# EAGLE board shift_4leds (EAGLE 5.06)
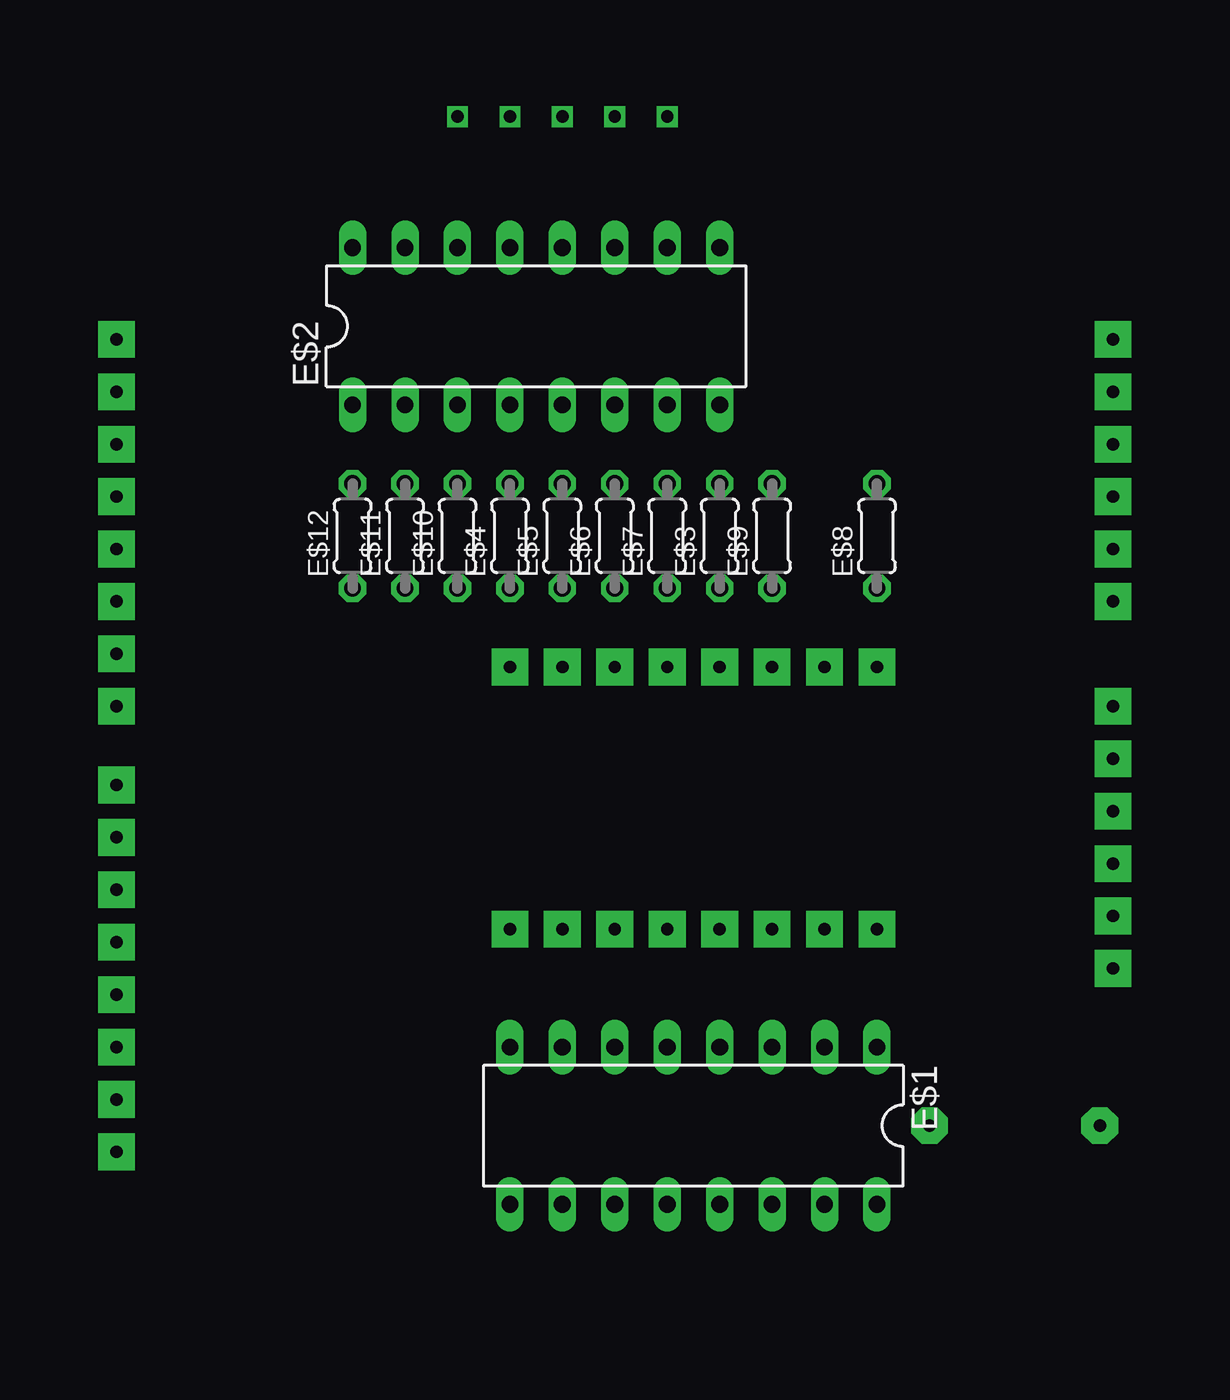
[diagram p0: board, top side]
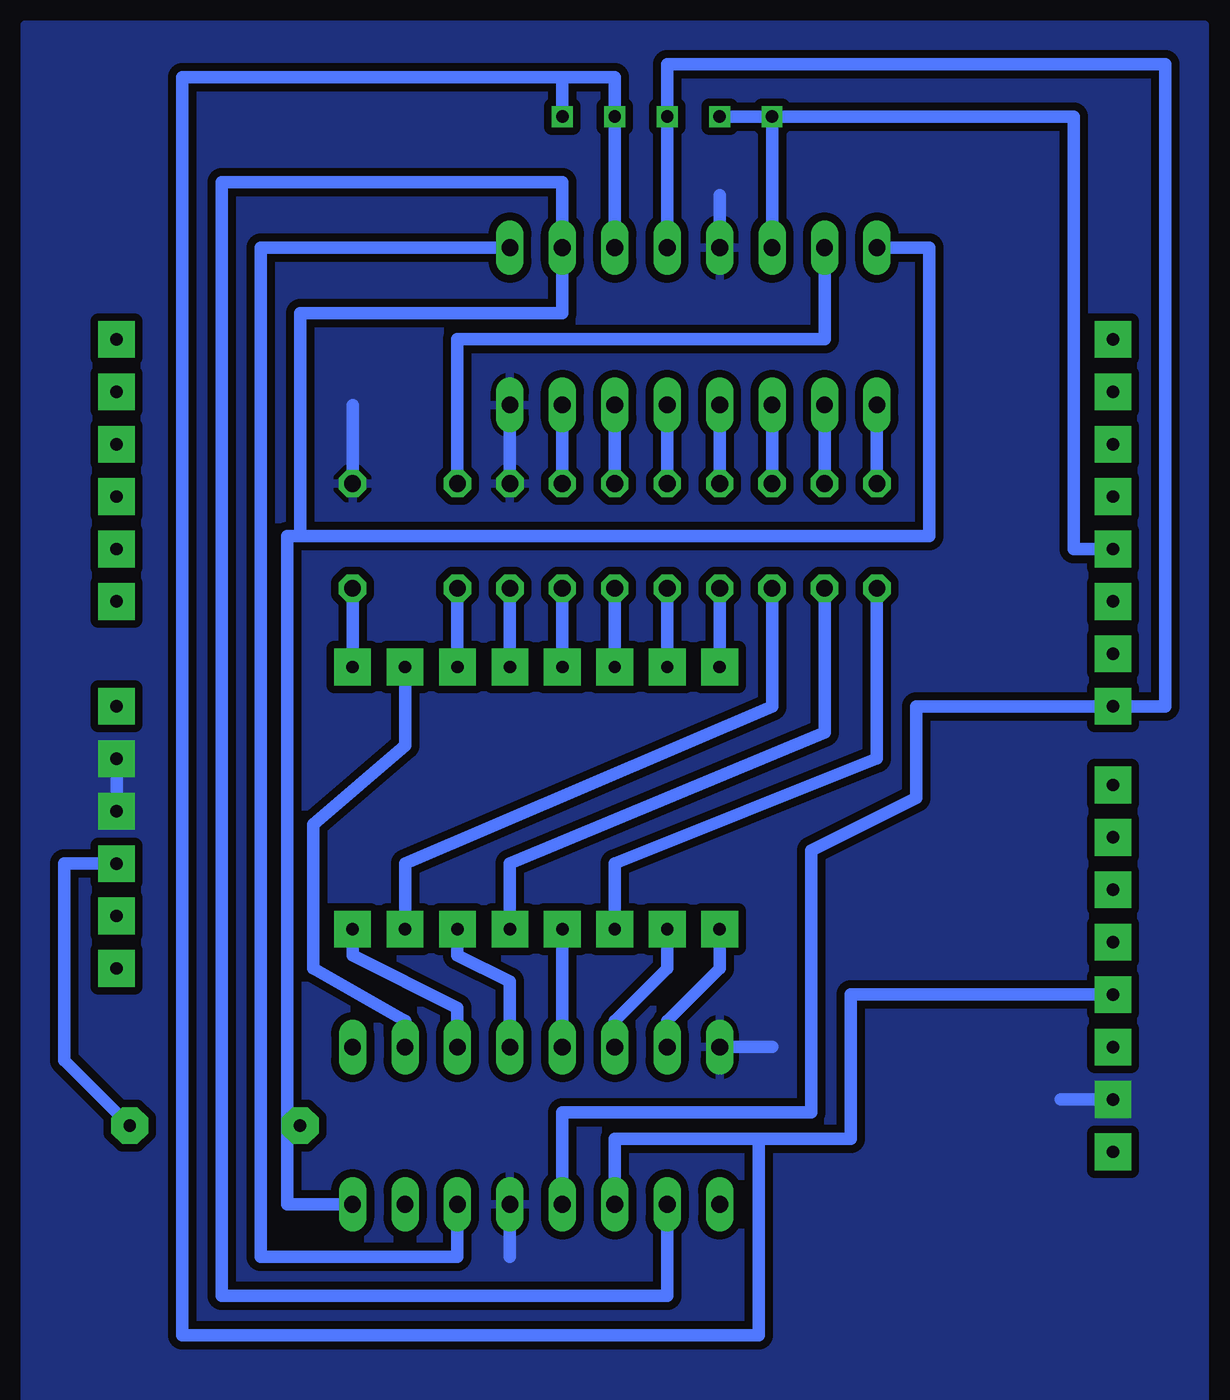
[diagram p1: board, bottom side, seen from below]

No outline drawn. Coordinates in mm, seen from the top.
Copper layers (1*16): Top 0.035mm / dielectric 1.5mm / Bottom 0.035mm
Design rules "default *": minimum track width 10mil, minimum drill 24mil, track to track 15mil, track to pad 15mil, pad to pad 8mil, via to via 8mil, smd to smd 8mil, copper to edge 40mil, drill to drill 8mil, minimum pad ring 10mil, minimum via ring 8mil, stop-mask expansion 4mil, vias tented up to drill 0mil, thermal gap 10mil

## Footprints (pad centres in the part's own frame; a part is rotated, then mirrored left to right if it is on the bottom)
DIL16 = drill 0.813 long: 1 -8.89,-3.81; 2 -6.35,-3.81; 3 -3.81,-3.81; 4 -1.27,-3.81; 5 1.27,-3.81; 6 3.81,-3.81; 7 6.35,-3.81; 8 8.89,-3.81; 9 8.89,3.81; 10 6.35,3.81; 11 3.81,3.81; 12 1.27,3.81; 13 -1.27,3.81; 14 -3.81,3.81; 15 -6.35,3.81; 16 -8.89,3.81
0204/5 = drill 0.813 octagon: 1 -2.54,0; 2 2.54,0

## Placement (x,y rotation side)
E$1  [DIL16]  68.58,14.61 180 top
E$2  [DIL16]  60.96,53.34 0 top
E$3  [0204/5]  69.85,43.18 90 top
E$4  [0204/5]  59.69,43.18 90 top
E$5  [0204/5]  62.23,43.18 90 top
E$6  [0204/5]  64.77,43.18 90 top
E$7  [0204/5]  67.31,43.18 90 top
E$8  [0204/5]  77.47,43.18 90 top
E$9  [0204/5]  72.39,43.18 90 top
E$10  [0204/5]  57.15,43.18 90 top
E$11  [0204/5]  54.61,43.18 90 top
E$12  [0204/5]  52.07,43.18 90 top

## Library data of the parts
E$1 E$2 = 40xx
E$3-E$12 = rcl

## Nets
+5V: E$1.10 E$1.16 E$2.16
GND: E$1.8 E$1.13 E$2.8 E$2.13 E$3.2 E$8.2
S$1: E$1.7
S$2: E$1.6
S$3: E$12.1
S$4: E$1.5
S$5: E$11.1
S$6: E$5.1
S$7: E$2.1 E$12.2
S$8: E$1.12 E$2.12
S$9: E$4.1
S$10: E$7.1
S$11: E$6.1
S$12: E$2.15 E$9.2
S$13: E$10.1
S$14: E$1.3
S$15: E$1.2
S$16: E$1.14 E$2.9
S$17: E$1.4
S$18: E$8.1
S$19: E$3.1
S$21: E$2.14
S$22: E$9.1
S$23: E$1.11 E$2.11
S$24: E$2.2 E$11.2
S$25: E$2.3 E$10.2
S$26: E$2.4 E$4.2
S$27: E$2.5 E$5.2
S$28: E$2.6 E$6.2
S$29: E$2.7 E$7.2

## Tracks (layer width: path | path; a pad name or v marks a point on that pad's centre or on a via)
+5V
  Bottom 0.61: 80.01,43.18 80.01,53.98 67.31,53.98 67.31,60.33 83.82,60.33 83.82,6.35 62.23,6.35 E$1.10 | 80.01,43.18 80.64,43.18 80.64,10.79 E$1.16 | E$2.16 49.53,57.15 49.53,43.18 80.01,43.18
GND  (via drill 0.6 pad 1.78)
  Bottom 0.61: 57.15,18.41 E$1.8 | E$2.13 59.69,59.69 | 69.85,8.26 E$1.13 | E$3.2 E$2.8 | E$8.2 77.47,49.53 | v88.9,29.84 v88.9,32.38 | v40.64,15.88 43.18,15.88
  pour Bottom: 36.2,67.94 93.34,67.94 93.34,0.64 36.2,0.64
S$1  (via drill 0.6 pad 1.78)
  Bottom 0.61: v59.69,24.13 59.69,22.23 62.23,19.68 E$1.7
S$2  (via drill 0.6 pad 1.78)
  Bottom 0.61: v62.23,24.13 62.23,22.23 64.77,19.68 E$1.6
S$3  (via drill 0.6 pad 1.78)
  Bottom 0.61: v64.77,24.13 64.77,27.3 52.07,32.38 E$12.1
S$4  (via drill 0.6 pad 1.78)
  Bottom 0.61: E$1.5 v67.31,24.13
S$5  (via drill 0.6 pad 1.78)
  Bottom 0.61: v69.85,24.13 69.85,27.3 54.61,33.66 E$11.1
S$6  (via drill 0.6 pad 1.78)
  Bottom 0.61: v62.23,36.83 E$5.1
S$7
  Bottom 0.61: E$12.2 E$2.1
S$8  (via drill 0.6, 0.6 pad 1.78)
  Bottom 0.61: E$2.12 v62.23,63.5 62.23,66.04 38.1,66.04 38.1,34.92 40.01,34.92 | 40.01,34.92 v40.64,34.92 | E$1.12 67.31,15.24 55.24,15.24 55.24,27.94 50.16,30.48 50.16,34.92 40.01,34.92
S$9  (via drill 0.6 pad 1.78)
  Bottom 0.61: v59.69,36.83 E$4.1
S$10  (via drill 0.6 pad 1.78)
  Bottom 0.61: v67.31,36.83 E$7.1
S$11  (via drill 0.6 pad 1.78)
  Bottom 0.61: v64.77,36.83 E$6.1
S$12
  Bottom 0.61: E$2.15 54.61,52.7 72.39,52.7 E$9.2
S$13  (via drill 0.6 pad 1.78)
  Bottom 0.61: v74.93,24.13 74.93,27.3 57.15,34.92 E$10.1
S$14  (via drill 0.6 pad 1.78)
  Bottom 0.61: v77.47,24.13 77.47,22.86 72.39,20.32 E$1.3
S$15  (via drill 0.6 pad 1.78)
  Bottom 0.61: v74.93,36.83 74.93,33.02 79.38,29.21 79.38,22.23 74.93,19.68 E$1.2
S$16
  Bottom 0.61: E$2.9 81.92,57.15 81.92,8.26 72.39,8.26 E$1.14
S$17  (via drill 0.6 pad 1.78)
  Bottom 0.61: E$1.4 69.85,21.59 72.39,22.86 v72.39,24.13
S$18  (via drill 0.6 pad 1.78)
  Bottom 0.61: v77.47,36.83 E$8.1
S$19  (via drill 0.6 pad 1.78)
  Bottom 0.61: v69.85,36.83 E$3.1
S$20  (via drill 0.6 pad 1.78)
  other vias: 40.64,52.7
S$21  (via drill 0.6, 0.6 pad 1.78)
  Bottom 0.61: v57.15,63.5 E$2.14 | v57.15,63.5 v59.69,63.5 | v57.15,63.5 42.55,63.5 42.55,42.55 v40.64,42.55
S$22  (via drill 0.6 pad 1.78)
  Bottom 0.61: v72.39,36.83 E$9.1
S$23  (via drill 0.6, 0.6 pad 1.78)
  Bottom 0.61: E$2.11 v64.77,63.5 64.77,65.41 67.31,65.41 | 67.31,65.41 v67.31,63.5 | 67.31,65.41 85.72,65.41 85.72,4.45 57.78,4.45 57.78,13.97 | E$1.11 64.77,13.97 57.78,13.97 | 57.78,13.97 53.34,13.97 53.34,20.95 v40.64,20.95
S$24
  Bottom 0.61: E$11.2 E$2.2
S$25
  Bottom 0.61: E$10.2 E$2.3
S$26
  Bottom 0.61: E$4.2 E$2.4
S$27
  Bottom 0.61: E$5.2 E$2.5
S$28
  Bottom 0.61: E$6.2 E$2.6
S$29
  Bottom 0.61: E$7.2 E$2.7
S$30  (via drill 0.6 pad 1.78)
  other vias: 40.64,50.16
S$31  (via drill 0.6 pad 1.78)
  other vias: 40.64,47.62
S$32  (via drill 0.6 pad 1.78)
  other vias: 40.64,45.09
S$33  (via drill 0.6 pad 1.78)
  other vias: 80.01,14.61
S$34  (via drill 0.6 pad 1.78)
  other vias: 40.64,40.01
S$35  (via drill 0.6 pad 1.78)
  other vias: 40.64,37.47
S$37  (via drill 0.6 pad 1.78)
  other vias: 40.64,31.11
S$38  (via drill 0.6 pad 1.78)
  other vias: 40.64,28.57
S$39  (via drill 0.6 pad 1.78)
  other vias: 40.64,23.5
S$40  (via drill 0.6 pad 1.78)
  other vias: 40.64,26.04
S$42  (via drill 0.6 pad 1.78)
  other vias: 40.64,18.41
S$44  (via drill 0.6 pad 1.78)
  other vias: 40.64,13.34
S$45  (via drill 0.6 pad 1.78)
  other vias: 88.9,52.7
S$46  (via drill 0.6 pad 1.78)
  other vias: 88.9,50.16
S$47  (via drill 0.6 pad 1.78)
  other vias: 88.9,47.62
S$48  (via drill 0.6 pad 1.78)
  other vias: 88.9,45.09
S$49  (via drill 0.6 pad 1.78)
  other vias: 88.9,42.55
S$50  (via drill 0.6 pad 1.78)
  other vias: 88.9,40.01
S$51  (via drill 0.6 pad 1.78)
  other vias: 88.9,34.92
S$54  (via drill 0.6 pad 1.78)
  Bottom 0.61: v88.9,27.3 91.44,27.3 91.44,17.78 v88.27,14.61
S$55  (via drill 0.6 pad 1.78)
  other vias: 88.9,24.77
S$56  (via drill 0.6 pad 1.78)
  other vias: 88.9,22.23